# Altium PCB EE91.PcbDoc
Units mil, origin at the board's own origin, x right, y up, seen from the top; angles counter-clockwise.
Board outline 2250 x 2500 mil, 4 copper layers (Top Layer, GND, +-12 Plane, +3.3, +5, and Via Connections), stack 23.756 mil thick; 39 components, 16 nets, 82 pads, 4 vias.
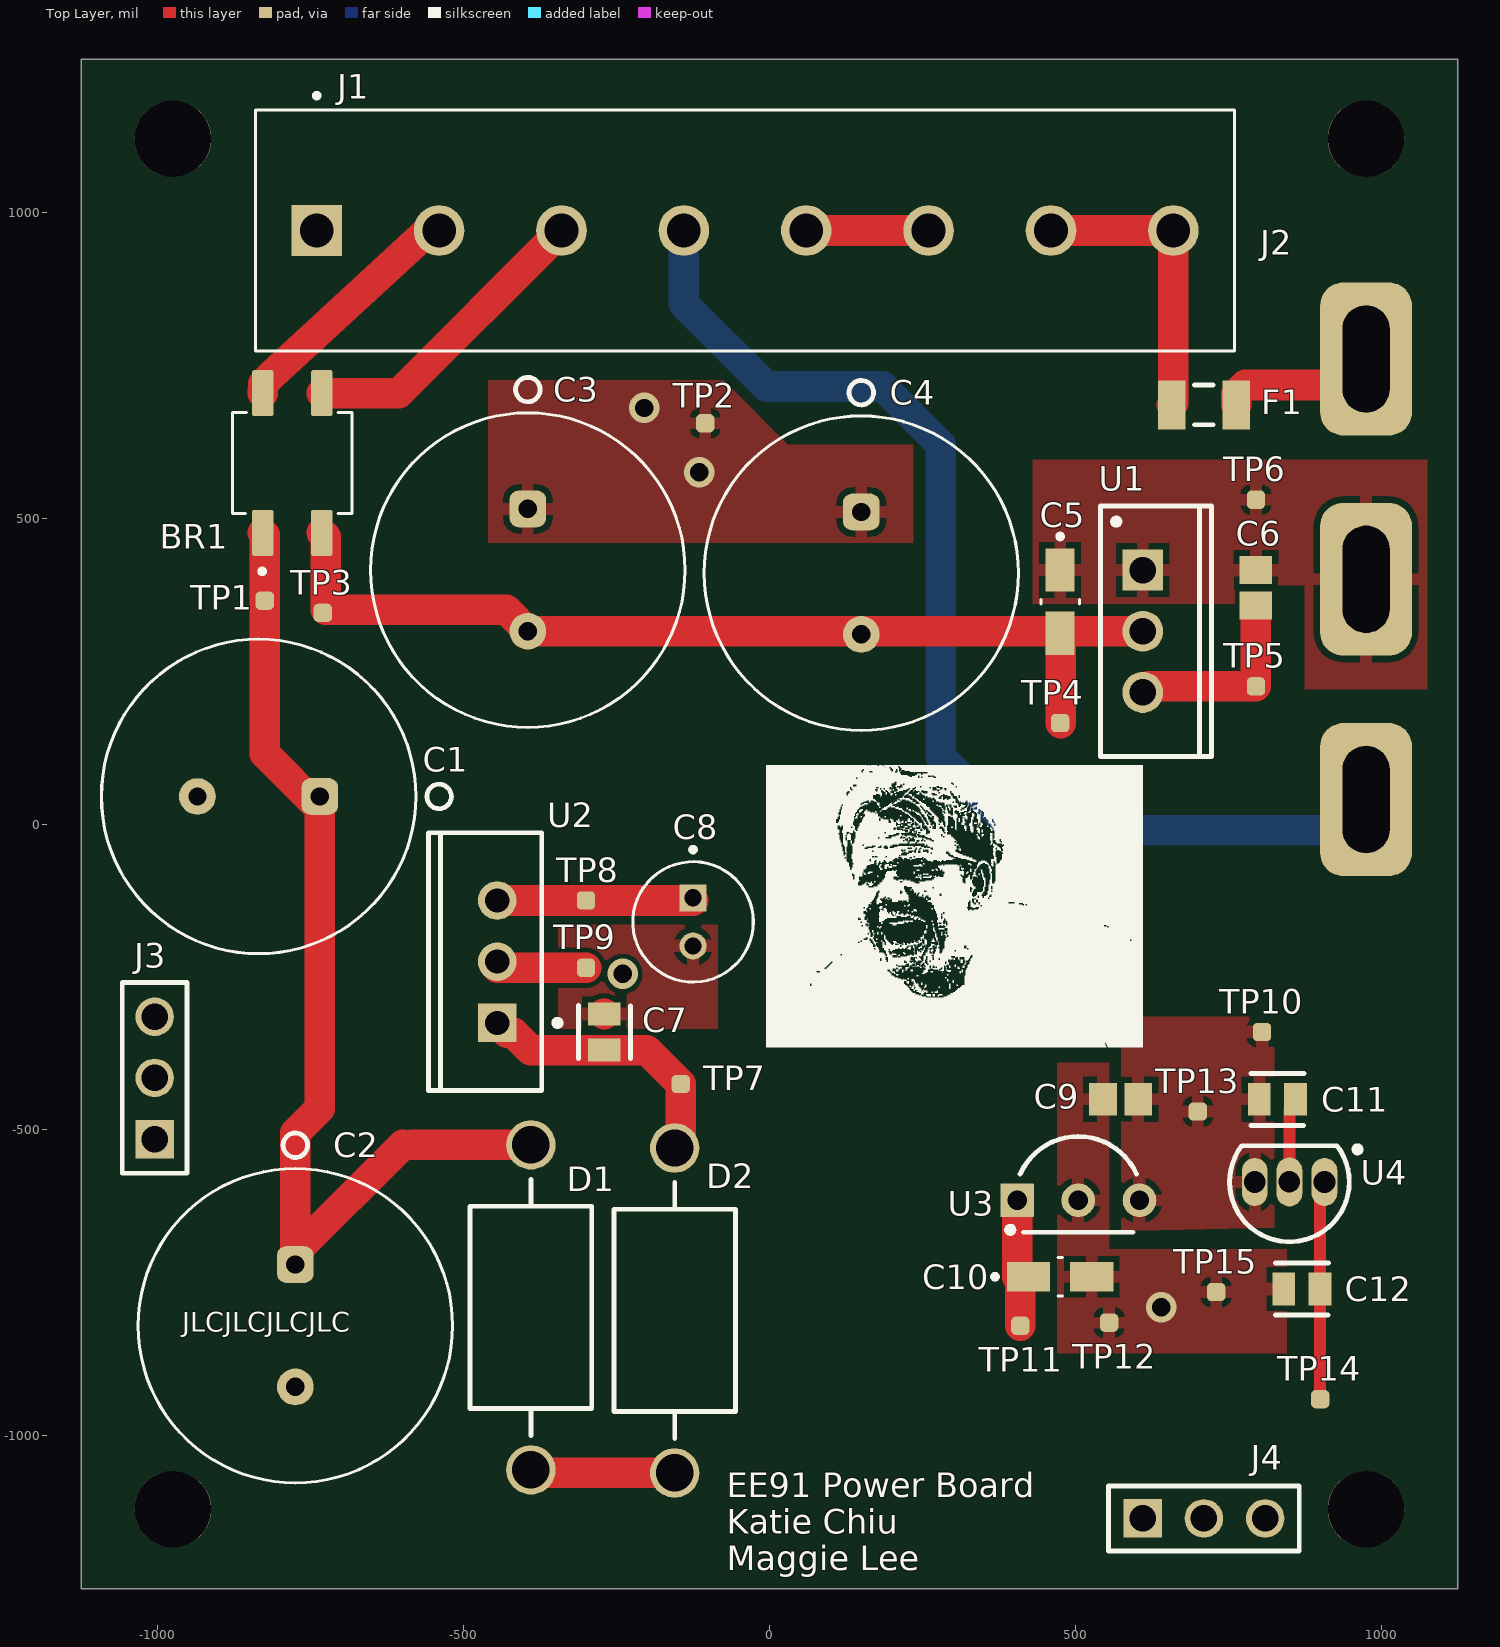
[diagram p0: Top Layer view]
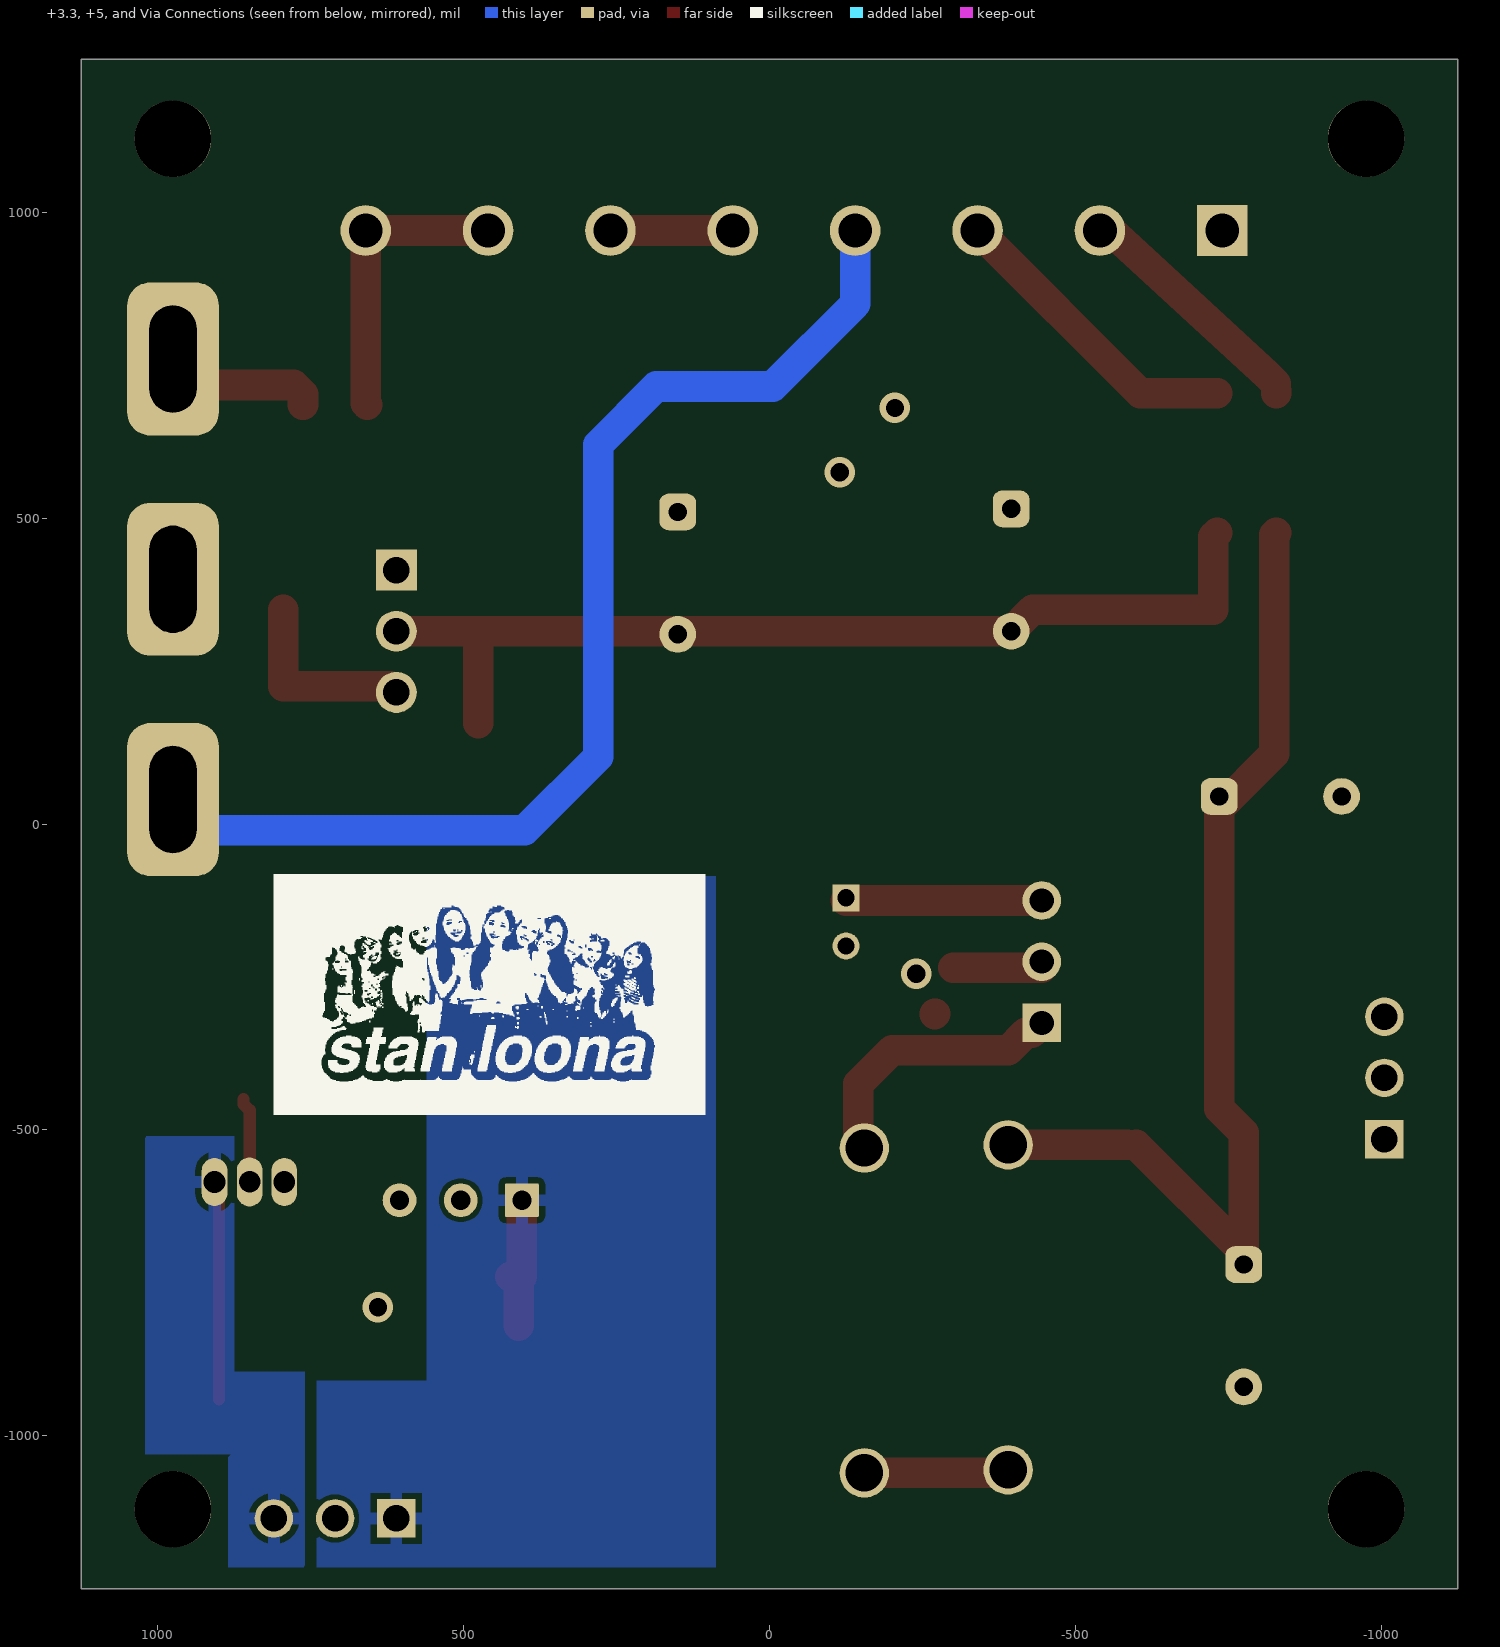
[diagram p1: +3.3, +5, and Via Connections view, seen from below]
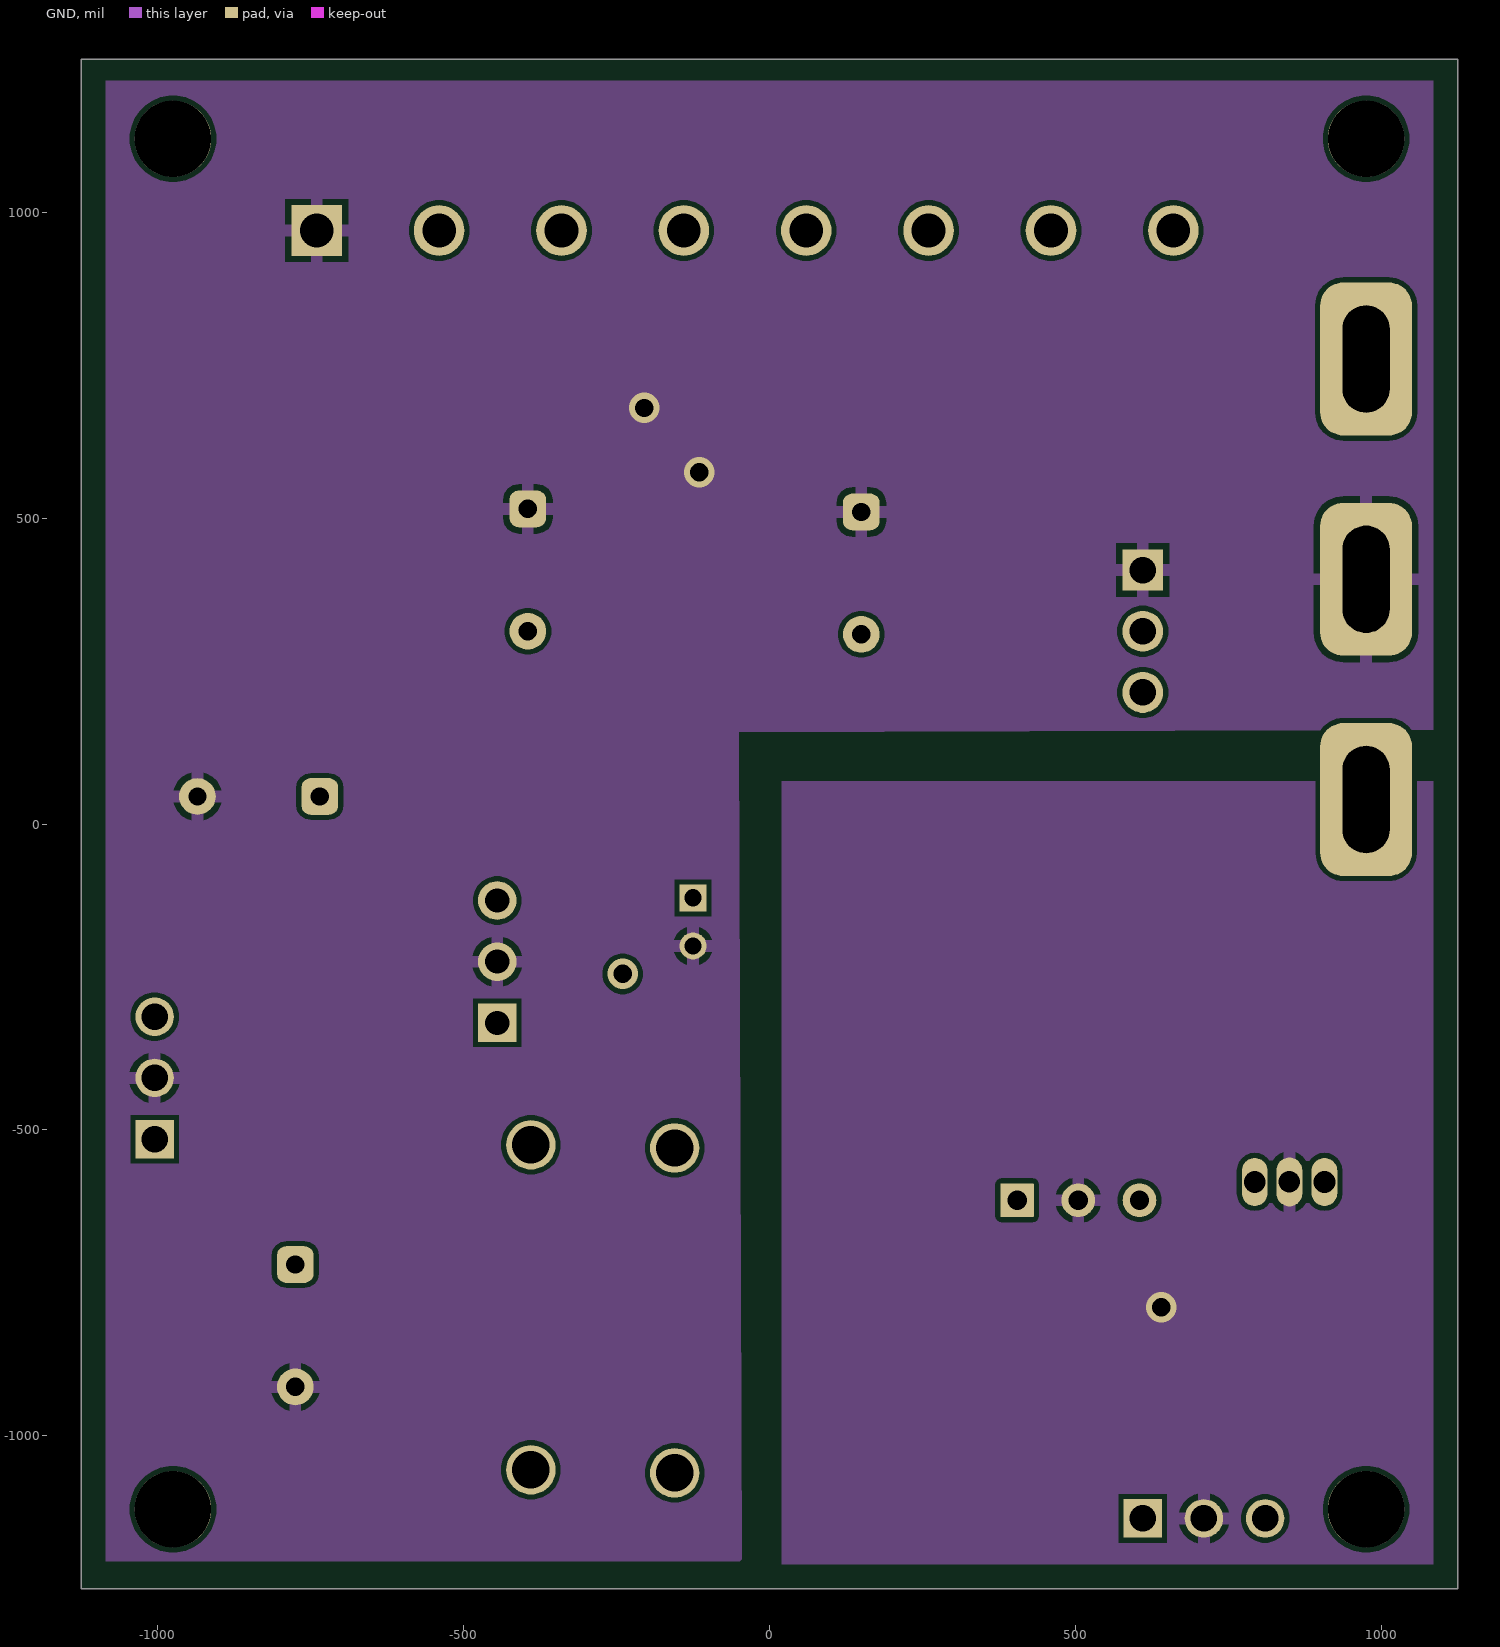
[diagram p2: GND]
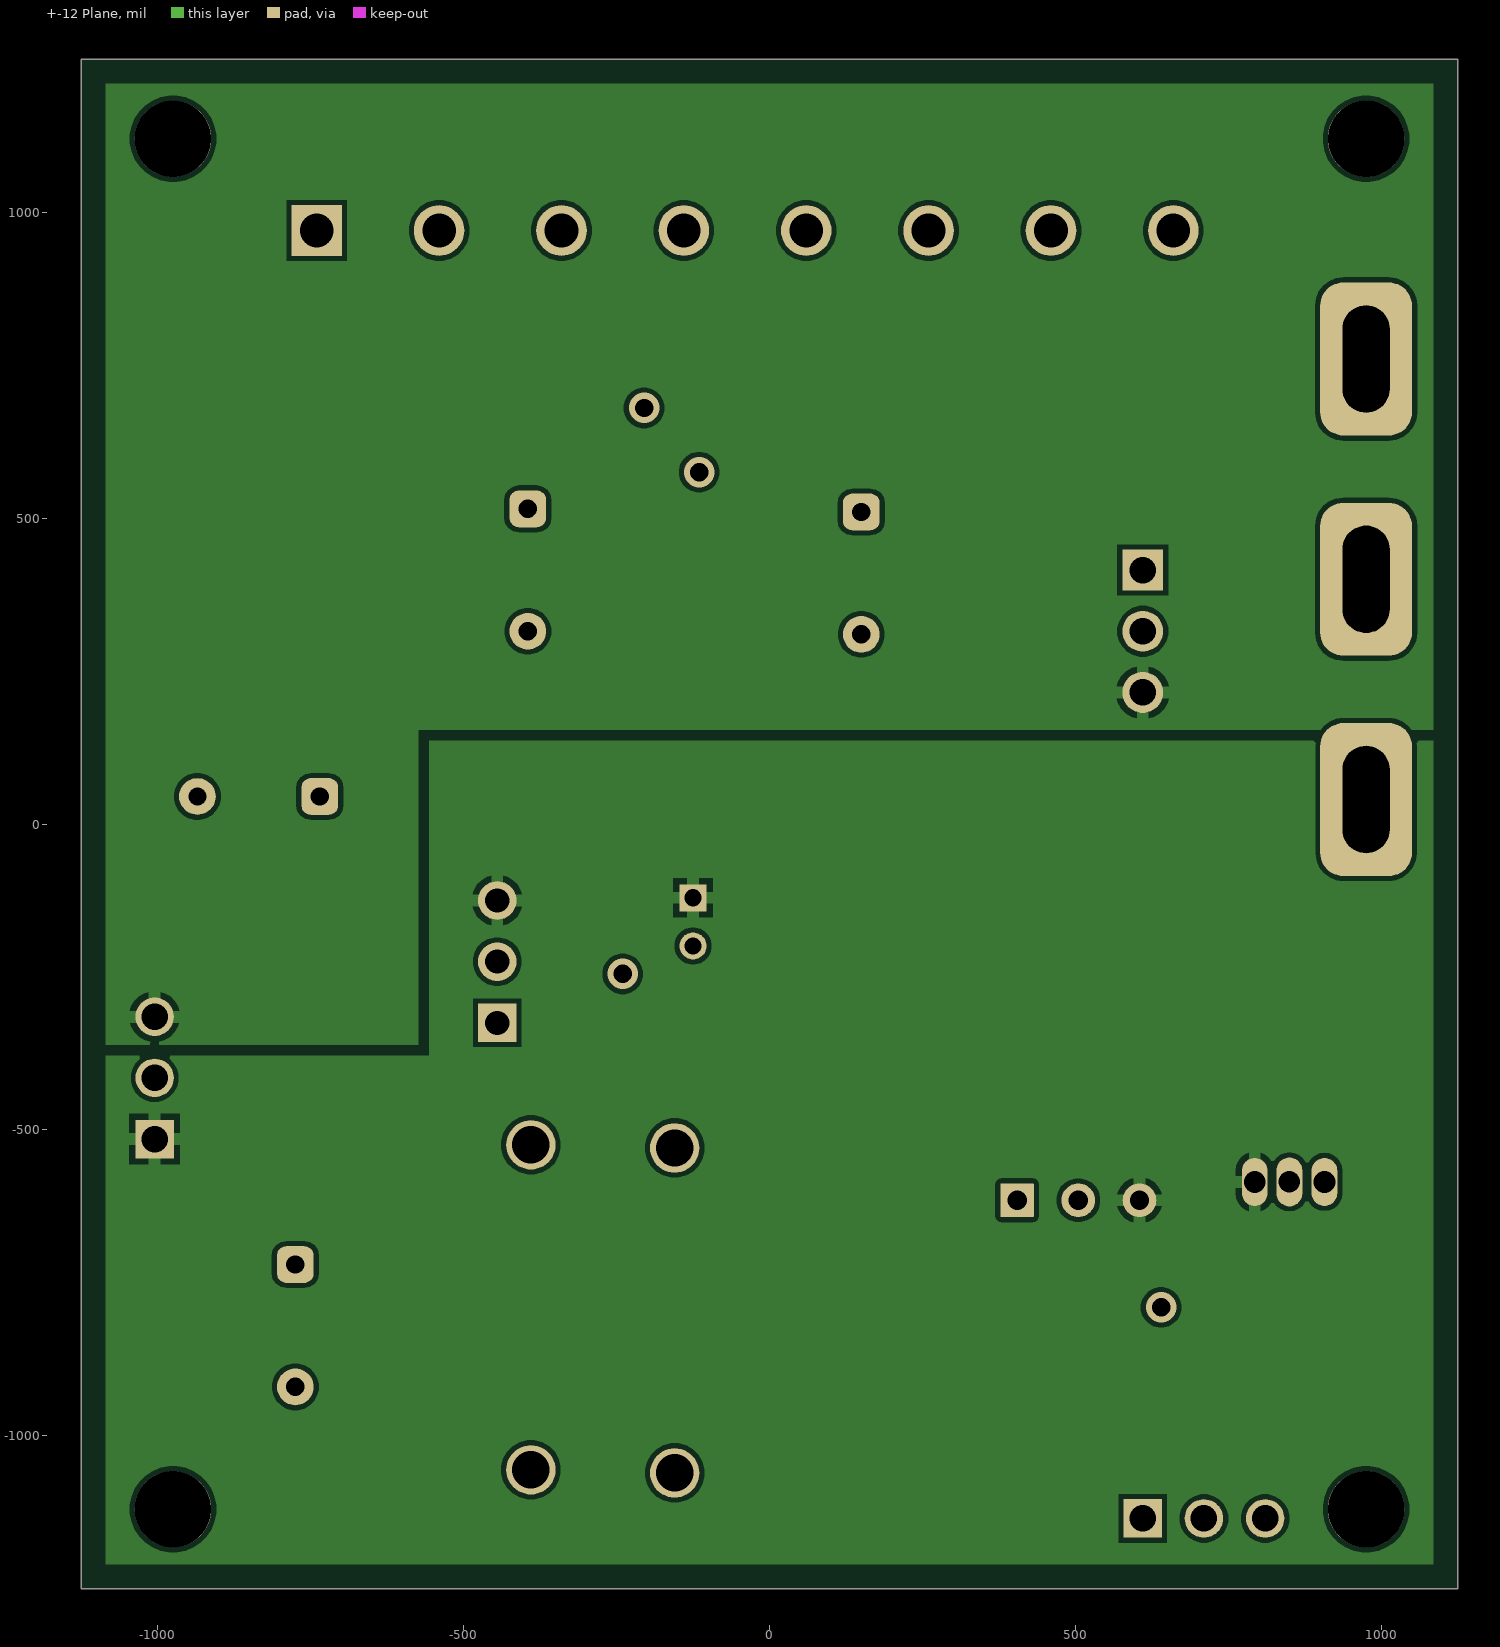
[diagram p3: +-12 Plane]

## Layer stack, top to bottom
Top Solder: solder mask 0.4, Solder Resist, Dk 3.5
Top Layer: signal copper 1.4
Dielectric 1: prepreg 2.8, PP-006, Dk 4.1
GND: signal copper 1.378
Dielectric 2: core 12.6, FR-4, Dk 4.8
+-12 Plane: signal copper 1.378
Dielectric 3: prepreg 2.8, PP-006, Dk 4.1
+3.3, +5, and Via Connections: signal copper 1.4
Bottom Solder: solder mask 0.4, Solder Resist, Dk 3.5

## Board outline
-1125,-1250 -1125,1250 1125,1250 1125,-1250

## Design rules (kind name [scope] priority, off if disabled: settings)
BoardOutlineClearance [All] p1: gap=7.87 ignorepadtopadclearanceinfootprint=FALSE except(15.75: Arc-SplitBarrior Arc-SplitContinuation Track-SplitBarrior Track-SplitContinuation SMDPad-SplitBarrior SMDPad-SplitContinuation THPad-SplitBarrior THPad-SplitContinuation Via-SplitBarrior Via-SplitContinuation Fill-SplitBarrior Fill-SplitContinuation Poly-SplitBarrior Poly-SplitContinuation Region-SplitBarrior Region-SplitContinuation Text-SplitBarrior Text-SplitContinuation)
Clearance "Clearance Bottom Layer" [OnLayer('Bottom Layer')] p1: gap=8 ignorepadtopadclearanceinfootprint=TRUE except(10: Arc-Text Track-Text SMDPad-Text THPad-Text Via-Text Fill-Text Poly-Text Region-Text Text-Text)
Clearance "Clearance Top Layer" [OnLayer('Top Layer')] p2: gap=8 ignorepadtopadclearanceinfootprint=TRUE except(10: Arc-Text Track-Text SMDPad-Text THPad-Text Via-Text Fill-Text Poly-Text Region-Text Text-Text)
Clearance [All] p3: gap=7.87 ignorepadtopadclearanceinfootprint=FALSE except(3.5: Arc-Arc Arc-Track Arc-SMDPad Track-Track Track-SMDPad SMDPad-SMDPad; 5: Arc-Via Track-Via SMDPad-Via THPad-Via Via-Via; 10: Arc-Text Track-Text SMDPad-Text THPad-Text Via-Text Fill-Text Poly-Text Region-Text Text-Text)
HoleSize [All] p1: absolutevalues=TRUE maxlimit=248.03 minlimit=7.87 maxpercent=80.000 minpercent=20.000
MinimumAnnularRing [All] p1: minimumring=3
MinimumSolderMaskSliver [All] p1: minsoldermaskwidth=3.94
PolygonConnect PolygonConnect_1 [All] p1: thpad.connectstyle=Relief thpad.reliefconductorwidth=20 thpad.reliefentries=4 thpad.polygonreliefangle="90 Angle" thpad.airgapwidth=10 smdpad.connectstyle=Relief smdpad.reliefconductorwidth=20 smdpad.reliefentries=4 smdpad.polygonreliefangle="90 Angle" smdpad.airgapwidth=10 via.connectstyle=Direct via.reliefconductorwidth=20 via.reliefentries=4 via.polygonreliefangle="90 Angle" via.airgapwidth=10
RoutingCorners [All] p1: cornerstyle=Round minsetback=100 maxsetback=100
RoutingVias [All] p1: holewidth=19.68 width=39.37 viastyle="Through Hole" minholewidth=7.87 minwidth=17.72 maxholewidth=39.37 maxwidth=78.74
SilkToSilkClearance [All] p1: silktosilkclearance=3.94
SilkToSolderMaskClearance [IsPad] p1: minsilkscreentomaskgap=3.94 clearancetoexposedcopper=TRUE
SolderMaskExpansion [All] p1: expansion=4 istentingtop=FALSE
Width [All] p1: maxlimit=100 minlimit=3.5 preferedwidth=15
25 further rules are at their usual default settings.

## Classes and differential pairs
component class Power_Connections: F1 J2 J3 J4
component class U_Wall_Power_to_+-20: BR1 C1 C2 C3 C4 D1 D2 J1 TP1 TP2 TP3
component class U_-20_to_-12: C5 C6 TP4 TP5 TP6 U1
component class U_+20_to_+12: C7 C8 TP7 TP8 TP9 U2
component class U_+12_to_+5: C11 C12 TP13 TP14 TP15 U4
component class U_+12_to_+3.3: C9 C10 TP10 TP11 TP12 U3

## Components (designator, comment, footprint, x,y, rotation, side; value= is the part's Value field where it differs from the comment)
BR1 "MB10S" SOIC245P670X290-4N -780,590 r90 top
C1 "470uF" PCBComponent_1#1 -835,45 r180 top
C2 "470uF" PCBComponent_1#1 -775,-820 r270 top
C3 "470uF" PCBComponent_1#1 -395,415 r270 top
C4 "470uF" PCBComponent_1#1 150,410 r270 top
C5 "2.2uF" CAPMP3216X180N 475,363.43 r270 top
C6 "1uF" CAPC2113X120X50LL20T30#1 795,387.56 r270 top
C7 "0.47uF" FP-C0805C-DG-MFG -270,-340 r90 top value=10uF
C8 "22uF" CAPPRD200W50D550H1250 -125,-160 r270 top
C9 "1uF" CAPC2113X120X50LL20T30#2 575,-450 r0 top
C10 "2.2uF" CAPMP3216X180N 475,-740 r0 top
C11 "0.33uF" FP-C0805C-DG-MFG 830,-450 r0 top value=10uF
C12 "0.1uF" FP-C0805C-DG-MFG 870,-760 r180 top value=10uF
D1 "BY500-600" ONSC-AXIAL_LEAD-2-267-05_V -390,-790 r90 top
D2 "BY500-600" ONSC-AXIAL_LEAD-2-267-05_V -155,-795 r270 top
F1 "C1F 3" FP-0466-MFG 710,685 r180 top
J1 "282857-8" 282857-8-Footprint-1 -35,965 r0 top
J2 "PX0575/10/PC" PCBComponent_1#2 975,400 r270 top
J3 "61300311121" 61300311121 -1005,-415 r90 top
J4 "61300311121" 61300311121 710,-1135 r0 top
TP1 "+20 TP" PCBComponent_1#3 -825,365 r270 top
TP2 "GND TP" PCBComponent_1#3 -105,655 r0 top
TP3 "-20 TP" PCBComponent_1#3 -730,345 r270 top
TP4 "-20 TP" PCBComponent_1#3 475,165 r90 top
TP5 "-12V TP" PCBComponent_1#3 795,225 r0 top
TP6 "GND TP" PCBComponent_1#3 795,530 r90 top
TP7 "+20 TP" PCBComponent_1#3 -145,-425 r270 top
TP8 "+12V TP" PCBComponent_1#3 -300,-125 r90 top
TP9 "GND TP" PCBComponent_1#3 -300,-235 r270 top
TP10 "+12V TP" PCBComponent_1#3 805,-340 r270 top
TP11 "+3.3V TP" PCBComponent_1#3 410,-820 r180 top
TP12 "GND TP" PCBComponent_1#3 555,-815 r180 top
TP13 "+12V TP" PCBComponent_1#3 700,-470 r90 top
TP14 "+5V TP" PCBComponent_1#3 900,-940 r180 top
TP15 "GND TP" PCBComponent_1#3 730,-765 r270 top
U1 "L7912ACV" TO220 610,315 r270 top
U2 "LM2940T-12.0/NOPB" NDE0003A -445,-225 r90 top
U3 "LP2950CZ-3.3/LFT3" LP0003A 504.69,-615 r90 top
U4 "L78L05ACZ-AP" TO-92 849.69,-585 r90 top

## Footprints (in the part's own frame and the unit in brackets; to place one, negate y for a bottom-side part, rotate by r counter-clockwise, add the part's x,y. Pads: shape width x height; smd on the part's side, far side on the other; paste and mask are expansions set on the pad)
282857-8-Footprint-1 [mm]
  rect 2.1x2.1 hole 1.4: 1(-17.907,0.127)
  round 2.1 hole 1.4: 2(-12.827,0.127) 3(-7.747,0.127) 4(-2.667,0.127) 5(2.413,0.127) 6(7.493,0.127) 7(12.573,0.127) 8(17.653,0.127)
  silkscreen extent -20.45,-4.87 20.19,5.83
61300311121 [mm] "Pin Header, pitch 2.54 mm, THT, Vertical, single row, 3p"
  rect 1.6x1.6 hole 1.1: 1(-2.54,0)
  round 1.6 hole 1.1: 2(0,0) 3(2.54,0)
  silkscreen extent -3.96,-1.35 3.96,1.35, body extent -3.81,-1.27 3.81,1.27, height 8.57
CAPC2113X120X50LL20T30#1 [mm] "Chip Capacitor, 2-Leads, Body 2.05x1.25mm, IPC High Density"
  rect 1.15x1.35 smd: 1(-0.7,0) 2(0.776,0)
  body extent -1.13,-0.72 1.12,0.72, height 1.2
CAPC2113X120X50LL20T30#2 [mm] "Chip Capacitor, 2-Leads, Body 2.05x1.25mm, IPC High Density"
  rect 1.15x1.35 smd: 1(-0.762,0) 2(0.7,0)
  body extent -1.13,-0.72 1.12,0.72, height 1.2
CAPMP3216X180N [mm]
  rect 1.79x1.21 smd: 1(-1.31,0) 2(1.31,0)
  silkscreen extent -2.8,-0.8 0.09,0.8
CAPPRD200W50D550H1250 [mm]
  rect 1.12x1.12 hole 0.72: 1(-1,0)
  round 1.12 hole 0.72: 2(1,0)
  silkscreen extent -3.1,-2.5 2.5,2.5
FP-0466-MFG [mil]
  rect 45x80 smd paste+0 mask+0: 1(-52.5,0) 2(52.5,0)
  silkscreen extent -15,-32 15,32, body extent -79,-44 79,44, height 10
FP-C0805C-DG-MFG [mm]
  rect 0.95x1.35 smd paste+0 mask+0: 1(-0.75,0) 2(0.75,0)
  silkscreen extent -1.11,-1.08 1.1,1.07, body extent -1.4,-0.85 1.4,0.85, height 0.25
LP0003A [mm] "TO, Flat Index; 3 In-Line, Formed Axial Leads; Body Dia. 4.8mm; Leads 0.56 x 0.41 mm (max)"
  rrect7% 1.4x1.4 hole 0.8: 1(0,2.54)
  round 1.4 hole 0.8: 2(0,0) 3(0,-2.54)
  silkscreen extent -1.35,-2.41 2.65,2.95, body extent -1.33,-2.83 2.35,2.83, height 9.01
NDE0003A [mm] "FM, 3-Leads, Body 10.7x4.7mm, Pitch 2.54mm"
  rect 1.6x1.6 hole 1: 1(-2.54,0)
  round 1.6 hole 1: 2(0,0) 3(2.54,0)
  silkscreen extent -5.35,-2.63 5.35,2.85, body extent -5.4,-1.9 5.4,2.9, height 19.4
ONSC-AXIAL_LEAD-2-267-05_V [mm] "AXIAL, 2-Leads, Diameter 5.05mm"
  round 2.05 hole 1.55: 1(-6.745,0) 2(6.745,0)
  silkscreen extent -5.32,-2.52 5.32,2.52
PCBComponent_1#1 [mil]
  rrect50% 60x60 hole 30: 1(-100,0)
  round 60 hole 30: 2(100,0)
  silkscreen extent -315,-257 257,257
PCBComponent_1#2 [mil]
  rrect50% 250x150 hole 77 slot 175 at 0 deg: 1(-360,0) 2(0,0) 3(360,0)
PCBComponent_1#3 [mil]
  rrect50% 30x30 smd: TP(0,0)
SOIC245P670X290-4N [mm]
  rrect23% 1.91x0.91 smd: 1(-2.9,1.225) 2(-2.9,-1.225) 3(2.9,-1.225) 4(2.9,1.225)
  silkscreen extent -4.6,-2.48 2.1,2.48
TO220 [mm] "TO, Thru-Hole, Vertical, Heatsink Mounted; 3 In-Line Leads; Pitch 2.54 mm"
  rect 1.7x1.7 hole 1.1: 1(-2.54,0)
  round 1.7 hole 1.1: 2(0,0) 3(2.54,0)
  silkscreen extent -5.2,-1.75 5.2,2.85, body extent -5.25,-1.8 5.25,2.9, height 19.7
TO-92 [mil] "TO, Flat Index; 3 In-Line, Axial Leads; Body Dia. 4.7mm; Lead Dia. 0.56 mm (max)"
  oval 78.74x42 hole 35.43: 1(0,-57.31) 3(0,56.69)
  oval 80x42 hole 35: 2(0,0)
  silkscreen extent -98,-116 59,98, body extent -98,-98 59,98, height 195

## Part data
BR1: "Bridge Rectifier Single Phase Standard 1kV Surface Mount 4-SOIC", Package="SOIC-4 ON Semiconductor", Digi-Key_Part_Number=MB10SCT-ND, Digi-Key_Purchase_URL=https://www.digikey.com/product-detail/en/on-semiconductor/MB10S/MB10SCT-ND/2444921?utm_source=snapeda&utm_medium=aggregator&utm_campaign=symbol, MF="ON Semiconductor", MP=MB10S, SnapEDA_Link=https://www.snapeda.com/parts/MB10S/ON%20Semiconductor/view-part/1686091/?ref=snap
C1 C2 C3 C4: library part UPS1H471MPD-4, "470uF Joe Knows Electronics Capacitor Footprint.   13x20 mm diameter and length, Leads are 0.6mm, 5mm dist between leads, 4mm from edge"
C5 C10: library part CMP-001-00083-1, "Cap Tant Solid 2.2uF 35V A CASE 10% (3.2 X 1.6 X 1.6mm) SMD 3216-18 7Ohm 125°C T/R; Pin 1 is +, Pin 2 is -"
C6 C9: library part CMP-2007-04033-1, Manufacturer="AVX Interconnect / Elco", Part Number=TAJR105K020RNJ
C7 C11 C12: library part CMP-2007-03243-2, "CAP CER 10UF 10V X5R 0805", 3DS Part Number=220-00001, Capacitance=10uF, Manufacturer=Kemet, Manufacturer Part Number=C0805C106K8PACTU, Package=C0805C-DG, Temperature="-55°C to +85°C", Temperature Characteristic=X5R, Temperature Coefficient=15%, Temperature Range High=+85°C, Temperature Range Low=-55°C, Tolerance=10%, Voltage=10V, Automotive=No, Category=Cap, ComponentLink2Description=Datasheet, ComponentLink2URL=https://content.kemet.com/datasheets/KEM_C1006_X5R_SMD.pdf, Device Class L1="Passive Components", Device Class L2=Capacitors, Device Class L3="Ceramic Capacitors", Digikey Description="CAP CER 10UF 10V X5R 0805", Height=1.4mm, Ipc Land Pattern Name=CAPC200125X125, Lead Free=Yes, Material=Ceramic, Mouser Description="CAP CER 10UF 10V X5R 0805", Octopart=https://octopart.com/c0805c106k8pactu-kemet-98697, RoHS=TRUE, Voltage Rating=10V
C8: library part 860010572003-3, "Wurth Elektronik 22 µF 35 V Aluminum Electrolytic Capacitors Radial, Can - 2000 Hrs @ 85°C; Pin 1 is +, Pin 2 is -"
D1 D2: library part CMP-1055-00010-1, "Rectifier, 2-Pin Axial_Lead, Pb-Free, Tape and Reel", Manufacturer="On Semiconductor", PartNumber=1N5822RLG, ComponentLink1Description="Manufacturer URL", ComponentLink1URL=http://www.onsemi.com/, ComponentLink2Description=Datasheet, ComponentLink2URL=http://www.onsemi.cn/pub_link/Collateral/1N5820-D.PDF, ComponentLink3Description="Package Specification", ComponentLink3URL=http://www.onsemi.com/pub_link/Collateral/267-05.PDF, Configuration=Single, DatasheetVersion="Rev. 10", IFSM Max (A)=80, Mounting Technology="Through Hole", PackageDescription="2-Pin, Axial Lead, Diameter 5.05 mm", PackageReference=AXIAL_LEAD-2-267-05, PackageVersion="Rev. G, 06/2000", Packing="Tape and Reel", RoHS=TRUE
F1: library part CMP-08605-000081-1, "FUSE BOARD MNT 200MA 125VAC/VDC", Case Code (Imperial)=1206, Case Code (Metric)=3216, Current Rating=200mA, DC Cold Resistance=1.16R, Max Operating Temperature=90°C, Min Operating Temperature=-55°C, Package Quantity=5000, Resistance=1.15R, Voltage Rating=125V, Approvals=UL, Body Material=Thermoplastic, Case/Package=1206, Depth=1.52mm, Fuse Current=200mA, Fuse Type="Board Mount (Cartridge Style Excluded)", Height=0.023inch, Housing Material=Ceramic, Lead Free="Lead Free", Length=3.18mm, Mount="Surface Mount", Number of Pins=2, Packaging="Tape and Reel", Radiation Hardening=No, Terminal Material=Copper, Termination=SMD/SMT, Voltage Rating (AC)=125V, Voltage Rating (DC)=125V, Width=0.06inch, Working Voltage=125V
J1: library part CMP-002-00073-1, "Conn Eurostyle Block HDR 8 POS 5.08mm Solder ST Thru-Hole 24A Carton"
J2: library part CMP-002-00071-6, "Conn Inlet M 3 POS 9.17mm Solder RA Thru-Hole 3 Terminal 1 Port Bulk"
J3 J4: library part CMP-1502-01062-1, "THT Vertical Pin Header WR-PHD, Pitch 2.54 mm, Single Row, 3 pins", Contact Resistance=20mOhm, Manufacturer="Wurth Elektronik", Operating Temperature=-40to105degC, Rated Current=3A, Withstanding Voltage=500VAC, Working Voltage=250VAC, Datasheet URL=https://katalog.we-online.de/em/datasheet/6130xx11121.pdf, Gender=Male, Manufacturer URL=http://www.we-online.de, Mounting Technology=THT, Orientation=Vertical, Package Reference=61300311121, Packaging=Bag, Part Number=61300311121, Pin Number=3, Pitch=2.54mm, Publisher=WurthElektronik, Row Number=Single
TP1 TP2 TP3 TP4 TP5 TP6 TP7 TP8 TP9 TP10 TP11 TP12 TP13 TP14 TP15: library part Component_1
U1: library part CMP-0244-00427-1, "2% Negative Voltage Regulator, -12V, 3-Pin TO-220", ComponentLink1Description="Manufacturer URL", ComponentLink1URL=http://www.st.com, ComponentLink2Description=Datasheet, ComponentLink2URL=http://www.st.com/internet/com/TECHNICAL_RESOURCES/TECHNICAL_LITERATURE/DATASHEET/CD00000451.pdf, ComponentLink3Description="Package Specification", ComponentLink3URL=http://www.st.com/internet/com/TECHNICAL_RESOURCES/TECHNICAL_LITERATURE/PACKAGE_INFORMATION/CD00004649.pdf, DatasheetVersion=1/11/2010, PackageDescription="TO, Thru-Hole, Vertical, Heatsink Mounted; 3 In-Line Leads; Pitch 2.54 mm", PackageReference=TO220, PackageVersion=ver3.0
U2: library part CMP-0062-02521-3, "1A Low Dropout Regulator, 3-pin TO-220, Pb-Free", Manufacturer="Texas Instruments", PackageTopMarking="NSUZXYTTE#*LM2940T*12.0 P+", PowerWise=N, ComponentLink1Description="Datasheet URL", ComponentLink1URL=http://www.ti.com/general/docs/lit/getliterature.tsp?genericPartNumber=LM2940-N&fileType=pdf, CompType="LDO IC", PackageDescription="TO-220, Molded, 3 Lead, Straight", PackageReference=NDE0003A, PinCount=3, RoHS=Y
U3: library part CMP-0062-00052-3, "Series of Adjustable Micropower Voltage Regulators, 3-pin TO-92, Pb-Free", Manufacturer="Texas Instruments", PackageTopMarking=NSXYTT*2950*CZ3.3, PowerWise=N, Code_JEDEC=TO-226-AA, ComponentLink1Description="Datasheet URL", ComponentLink1URL=http://www.ti.com/general/docs/lit/getliterature.tsp?genericPartNumber=LP2950-N&fileType=pdf, CompType="LDO IC", PackageDescription="TO-92, Molded, 3 Lead", PackageReference=LP0003A, PinCount=3, RoHS=Y
U4: library part CMP-0244-00019-1, "Positive Voltage Regulator, 5V, 3-Pin TO-92", ComponentLink1Description="Manufacturer URL", ComponentLink1URL=http://www.st.com, ComponentLink2Description=Datasheet, ComponentLink2URL=http://www.st.com/internet/com/TECHNICAL_RESOURCES/TECHNICAL_LITERATURE/DATASHEET/CD00000446.pdf, DatasheetVersion=1/02/2011, PackageDescription="TO, Flat Index; 3 In-Line, Axial Leads; Body Dia. 4.7mm; Lead Dia. 0.56 mm (max)", PackageReference=TO-92, PackageVersion=2011

## Free pads (board coordinates)
  round 125 hole 125 unplated: 3(-975,-1120) 5(-975,1120) 5(975,-1120) 5(975,1120)

## Via types
v1: diameter 50, hole 30, Top Layer to +3.3, +5, and Via Connections, 4 vias

## Nets (pads, with @x,y where several pads share a name; then routed paths per layer and width w, separated by ;. In a path a pad name is that pad's centre, name@x,y a point inside that pad or via, vN(x,y) a via of type N, cw(c..) or ccw(c..) an arc to the next point about the centre after c; other vN are vias at no path point)
+3.3V: C10.1 J4.1 TP11.TP U3.1 | length 223.7
  Top Layer w50: U3.1 404.69,-740 C10.1@410,-740 ; TP11.TP C10.1@410,-740 ; C10.1 C10.1@410,-740
+5V: C12.1 J4.3 TP14.TP U4.1 | length 355
  Top Layer w20: TP14.TP@899.69,-940 U4.1@899.69,-585
+12V: C8.1 C9.2 C11.1 J3.1 TP8.TP TP10.TP TP13.TP U2.3 U3.3 U4.3 | length 320
  Top Layer w50: U2.3 TP8.TP C8.1@-125,-125
-12V: C6.2 J3.3 TP5.TP U1.3 | length 314.1
  Top Layer w50: U1.3 620,225 TP5.TP C6.2@795,350
AGND: C1.2 C2.2 C3.1 C4.1 C5.1 C6.1 C7.2 C8.2 J1.1 J2.2 J3.2 TP2.TP TP6.TP TP9.TP U1.1 U2.2 | length 145.9
  Top Layer w50: U2.2@-445,-235 TP9.TP ; C7.2@-270.66,-309.82 C7.2
  other v1: -115,575 -205,680
DGND: C9.1 C10.2 C11.2 C12.2 J4.2 TP12.TP TP15.TP U3.2 U4.2 | length 139.1
  Top Layer w20: U4.2 849.69,-467.71 859.53,-457.87 C11.2
  other v1: 640,-790
EGND: J1.4 J2.3 | length 1890
  +3.3, +5, and Via Connections w50: J1.4 -140,850 -5,715 185,715 280,620 280,110 400,-10 J2.3@975,-10
NetBR1_1: BR1.1 C1.1 C2.1 D1.2 TP1.TP | length 1693.7
  Top Layer w50: BR1.1 -825,472.6 TP1.TP -825,115 -735,25 -735,-465 -775,-505 C2.1@-775,-700 ; C2.1 C2.1@-775,-700 ; -599.45,-524.45 C2.1@-775,-700 ; -584.45,-524.45 D1.2
NetBR1_2: BR1.2 C3.2 C4.2 C5.2 TP3.TP TP4.TP U1.2 | length 1650
  Top Layer w50: BR1.2 -725,469.05 -725,350 -430,350 C3.2 170,315 500,315 ; C5.2 476.2,291.61 TP4.TP@476.2,165 ; C5.2@475,315 U1.2
NetBR1_3: BR1.3 J1.3 | length 501.9
  Top Layer w50: BR1.3 -605.83,704.17 J1.3
NetBR1_4: BR1.4 J1.2 | length 401.3
  Top Layer w50: BR1.4 -827.6,719.65 BR1.4@-813.98,733.27 ; BR1.4@-813.97,733.28 -813.26,733.99 -557.31,970.05 -541.23,970.05 J1.2
NetC7_1: C7.1 D2.1 TP7.TP U2.1 | length 449.7
  Top Layer w50: U2.1 -428.5,-341.5 -418.5,-341.5 -390,-370 C7.1@-270.47,-370 ; C7.1 -200.47,-369.53 TP7.TP -145,-511.14 -155,-521.14 D2.1
NetD1_1: D1.1 D2.2 | length 235
  Top Layer w50: D1.1@-390,-1060.55 D2.2
NetF1_1: F1.1 J2.1 | length 290.5
  Top Layer w50: F1.1 762.5,702.5 777.5,717.5 909.78,717.5 975,782.72 J2.1@975,810
NetF1_2: F1.2 J1.7 J1.8 | length 486
  Top Layer w50: J1.7 J1.8 660,687.5 F1.2
NetJ1_5: J1.5 J1.6 | length 200
  Top Layer w50: J1.5 J1.6
copper on no net:
  other v1: -240,-245

## Polygon pours and split planes (outlines as drawn)
AGND on Top Layer "AGND_L01_P022" (solid, pour order 22): 430,595 430,360 775,360 775,390 875,390 875,220 1075,220 1075,595
AGND on Top Layer "AGND_L01_P030" (solid, pour order 30): -345,-335 -85,-335 -85,-165 -345,-165
AGND on Top Layer "AGND_L01_P021" (solid, pour order 21): -460,725 -460,460 235,460 235,620 30,620 -75,725
+12V on Top Layer "+12V_L01_P019" (solid, pour order 19): 825,-315 575,-315 575,-665 600,-665 825,-660
DGND on Top Layer "DGND_L01_P020" (solid, pour order 20): 845,-865 470,-865 470,-390 555,-390 555,-695 845,-695
+5V on +3.3, +5, and Via Connections "+5V_L04_P024" (solid, pour order 24): 755,-1215 760,-1210 760,-895 875,-895 875,-510 1025,-510 1020,-515 1020,-1030 880,-1030 885,-1035 885,-1215
+3.3V on +3.3, +5, and Via Connections "+3.3V_L04_P023" (solid, pour order 23): 88.13,-1215 88.13,-83.13 90,-85 560,-85 560,-910 740,-910 740,-1215
+12V on +-12 Plane "+12V_L03_P026" (solid, pour order 26): -1085,-1210 -1085,-379 -556,-379 -556,136 1085,136 1085,-1210
-12V on +-12 Plane "-12V_L03_P025" (solid, pour order 25): -1085,-361 -574,-361 -574,120 -574,154 1085,154 1085,1210 -1085,1210
DGND on GND "DGND_L02_P028" (solid, pour order 28): 1,-1210 20,-1210 20,70 1085,70 1085,-1210
AGND on GND "AGND_L02_P027" (solid, pour order 27): -1085,-1205 -45,-1205 -50,150 1085,154 1085,1215 -1085,1215

## Silkscreen, mask and mechanical layers (free items; w line width, h text height)
Top Overlay:
  drawing of 174 lines, arcs and shapes, not listed
  text "JLCJLCJLCJLC" at -960,-830 h32
  text "EE91 Power Board / Katie Chiu / Maggie Lee" at -69.93,-1220 h40
Bottom Overlay:
  drawing of 94 lines, arcs and shapes, not listed
Board Outline:
  the board outline again, w10